# EAGLE board blinkmusb_b0_pcbjack (EAGLE 5.11)
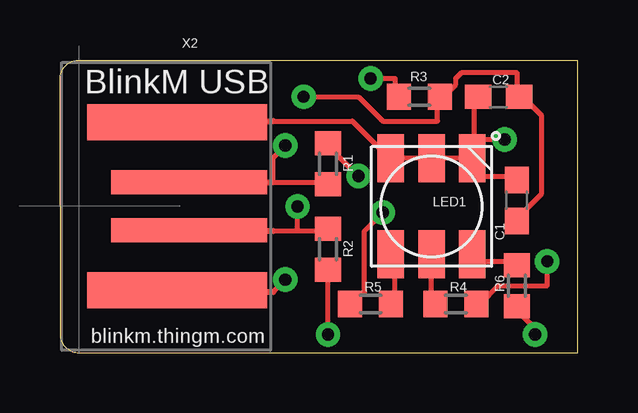
[diagram p0: board, top side]
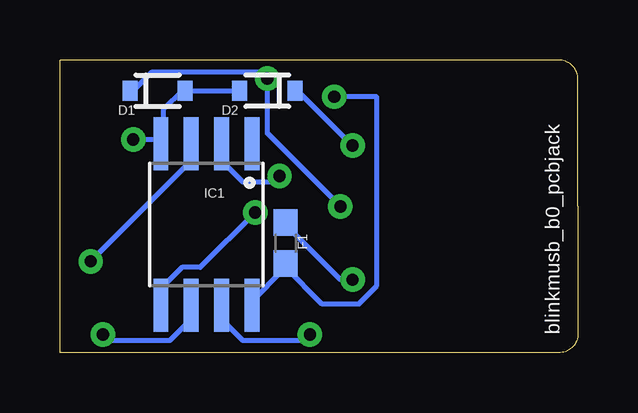
[diagram p1: board, bottom side, seen from below]

Size 21.6 x 12.2 mm. Coordinates in mm from the lower left corner, seen from the top.
Outline: 0.8,12.2 21.6,12.2 21.6,0 15.2,0 0.8,0 arc-90 0,0.8 0,6.1 0,11.4 arc-90 0.8,12.2
Copper layers (1*16): Top 0.035mm / dielectric 1.5mm / Bottom 0.035mm
Design rules "SparkFun": minimum track width 8mil, minimum drill 20mil, track to track 8mil, track to pad 8mil, pad to pad 8mil, via to via 8mil, smd to smd 8mil, copper to edge 10mil, drill to drill 8mil, minimum pad ring 12mil, minimum via ring 10mil, stop-mask expansion 4mil, vias tented up to drill 25mil, thermal gap 10mil
tRestrict: area 22.1,-0.8 to 30,12.7

## Footprints (pad centres in the part's own frame; a part is rotated, then mirrored left to right if it is on the bottom)
C0603 = smd 1.1 x 1: 1 -0.85,0; 2 0.85,0
SOD-323 = smd 0.63 x 0.83: 1 -1.15,0; 2 1.15,0
0603 = smd 1.1 x 1: 1 -0.85,0; 2 0.85,0
SO08-EIAJ = smd 0.61 x 2.21: 1 -1.905,-3.378; 2 -0.635,-3.378; 3 0.635,-3.378; 4 1.905,-3.378; 5 1.905,3.353; 6 0.635,3.353; 7 -0.635,3.353; 8 -1.905,3.353
RGBLED5050 = smd 2 x 1.1: 1 -2,1.7; 2 -2,0; 3 -2,-1.7; 4 2,-1.7; 5 2,0; 6 2,1.7
R0603 = smd 1 x 1.1: 1 -0.85,0; 2 0.85,0
USB-A-PCB = smd 7.5 x 1.5: 5V -0.2,-3.5; GND -0.2,3.5 | smd 6.5 x 1: USB_M 0.3,-1; USB_P 0.3,1

## Placement (x,y rotation side)
C1  100n  [C0603]  19.05,6.35 90 top
C2  10uF  [C0603]  18.29,10.67 180 top
D1  3.6V  [SOD-323]  17.53,10.92 0 bottom
D2  3.6V  [SOD-323]  12.95,10.92 180 bottom
F1  PTC0603  [0603]  12.19,4.57 270 bottom
IC1  ATTINY45SOIC  [SO08-EIAJ]  15.49,5.33 180 bottom
LED1  RGBLED5050  [RGBLED5050]  15.49,6.1 90 top
R1  68  [R0603]  11.18,7.87 270 top
R2  68  [R0603]  11.18,4.32 90 top
R3  1k5  [R0603]  14.99,10.67 180 top
R4  100  [R0603]  16.51,2.03 180 top
R5  100  [R0603]  12.95,2.03 0 top
R6  60  [R0603]  19.05,2.79 90 top
X2  USBPCB  [USB-A-PCB]  5.08,6.1 0 top

## Library data of the parts
C1 C2 R1-R6 = rcl
D1 D2 F1 X2 = SparkFun-20110517
IC1 = todstuff
LED1 = adafruit-20120122

## Nets
BLU: IC1.6 R6.1
D+: IC1.2 R1.1
D-: IC1.7 R2.1
GND: C1.2 C2.2 D1.2 D2.2 IC1.4 LED1.4 LED1.5 LED1.6 X2.GND
GRN: IC1.5 R5.1
RBLU: LED1.3 R6.2
RED: IC1.3 R4.1
RGRN: LED1.1 R5.2
RRED: LED1.2 R4.2
RST: IC1.1
USB_M: D1.1 R2.2 R3.2 X2.USB_M
USB_P: D2.1 R1.2 X2.USB_P
VBUS: F1.1 X2.5V
VCC: C1.1 C2.1 F1.2 IC1.8 R3.1

## Tracks (layer width: path | path; a pad name or v marks a point on that pad's centre or on a via)
BLU  (via drill 0.51)
  Top 0.203: v19.81,0.76 19.81,1.02 19.05,1.78 R6.1
  Bottom 0.203: v19.81,0.76 19.56,0.51 17.02,0.51 16.26,1.27 16.26,1.78 IC1.6
D+  (via drill 0.51)
  Top 0.203: v12.45,7.37 11.18,8.64 R1.1
  Bottom 0.203: v12.45,7.37 12.7,7.11 13.97,7.11 14.73,7.87 14.73,8.64 IC1.2
D-  (via drill 0.51)
  Top 0.203: v11.18,0.76 11.18,3.3 R2.1
  Bottom 0.203: v11.18,0.76 11.43,0.51 13.97,0.51 14.73,1.27 14.73,1.78 IC1.7
GND  (via drill 0.51)
  Top 0.203: 15.49,8.13 13.97,8.13 LED1.6 13.72,8.13 12.19,9.65 8.89,9.65 | 15.49,8.13 LED1.5 15.49,8.13 | C1.2 19.05,7.37 17.27,7.37 17.27,7.87 LED1.4 | 17.27,8.89 17.27,8.13 LED1.4 | 17.27,8.89 17.27,10.67 C2.2 | 15.49,8.13 17.02,8.13 LED1.4 | 17.27,8.89 v18.54,8.89 | LED1.4 17.27,8.89
  Top 0.254: X2.GND 4.94,9.65 8.89,9.65
  Bottom 0.203: D2.2 14.22,10.92 16.26,10.92 D1.2 16.51,10.92 17.27,10.16 17.27,8.89 IC1.4 17.53,8.89 v18.54,8.89
GRN  (via drill 0.51)
  Top 0.203: v13.46,5.84 12.7,5.08 12.7,2.54 12.19,2.03 R5.1
  Bottom 0.203: v13.46,5.84 15.75,3.56 16.51,3.56 17.27,2.79 17.27,2.03 IC1.5
RBLU
  Top 0.203: R6.2 19.05,3.81 17.27,3.81 17.27,4.06 LED1.3
RED  (via drill 0.51)
  Top 0.203: v20.32,3.81 20.32,2.79 18.29,2.79 17.53,2.03 R4.1
  Bottom 0.203: v20.32,3.81 16.26,7.87 16.26,8.64 IC1.3
RGRN
  Top 0.203: R5.2 13.97,2.03 13.97,4.06 LED1.1
RRED
  Top 0.203: R4.2 15.49,2.03 15.49,4.06 LED1.2
USB_M  (via drill 0.51)
  Top 0.203: 8.89,5.08 9.91,5.08 | 9.91,5.08 11.18,5.08 R2.2 | v12.95,11.43 13.97,11.43 13.97,10.67 R3.2 | 9.91,5.08 v9.91,6.1
  Top 0.254: X2.USB_M 5.4,5.08 8.89,5.08
  Bottom 0.203: D1.1 18.54,10.92 17.78,11.68 13.21,11.68 v12.95,11.43 12.95,9.14 v9.91,6.1
USB_P  (via drill 0.51)
  Top 0.203: v9.4,8.64 8.89,8.13 8.89,7.11 11.18,7.11 R1.2
  Top 0.254: X2.USB_P 5.4,7.11 8.89,7.11
  Bottom 0.203: v9.4,8.64 11.68,10.92 D2.1
VBUS  (via drill 0.51)
  Top 0.203: 8.89,2.54 v9.4,3.05
  Top 0.254: X2.5V 4.94,2.54 8.89,2.54
  Bottom 0.203: v9.4,3.05 9.91,3.05 12.19,5.33 F1.1
VCC  (via drill 0.51)
  Top 0.203: C1.1 19.05,5.59 20.07,6.6 20.07,9.91 19.3,10.67 C2.1 19.05,10.67 19.05,11.68 16.76,11.68 16.51,11.43 16.51,11.18 16,10.67 R3.1 15.75,10.67 15.75,9.65 13.46,9.65 12.45,10.67 v10.16,10.67
  Bottom 0.203: 12.19,3.56 13.72,2.03 IC1.8 | 12.19,3.56 F1.2 12.19,3.56 | 12.19,3.56 10.67,2.03 9.14,2.03 8.38,2.79 8.38,10.67 v10.16,10.67

## Text on the board
tPlace: BlinkM USB | blinkm.thingm.com
bPlace: blinkmusb_b0_pcbjack